# Altium PCB ECEN4620_JurassicSpark_SubModule.PcbDoc
Units mil, origin at the board's own origin, x right, y up, seen from the top; angles counter-clockwise.
Board outline 1660 x 2500 mil, 2 copper layers (Top Layer, Bottom Layer), stack 61.756 mil thick; 29 components, 13 nets, 87 pads, 17 vias.
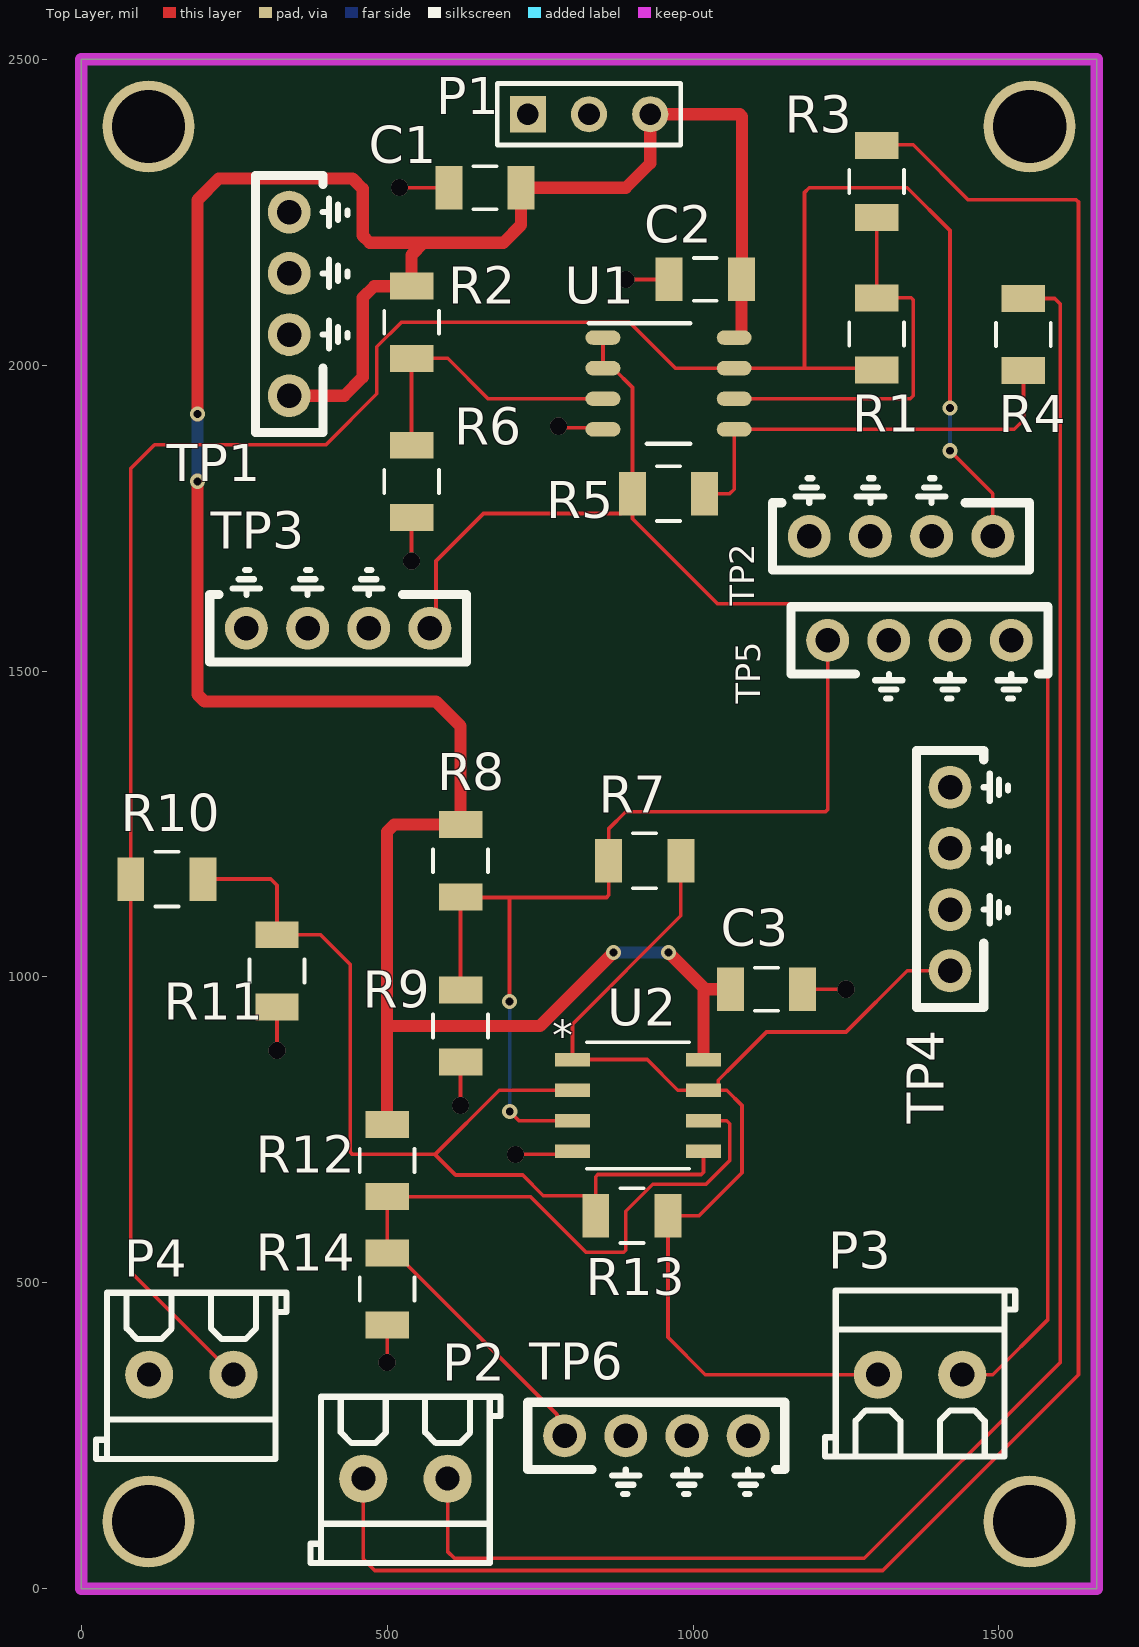
[diagram p0: Top Layer view]
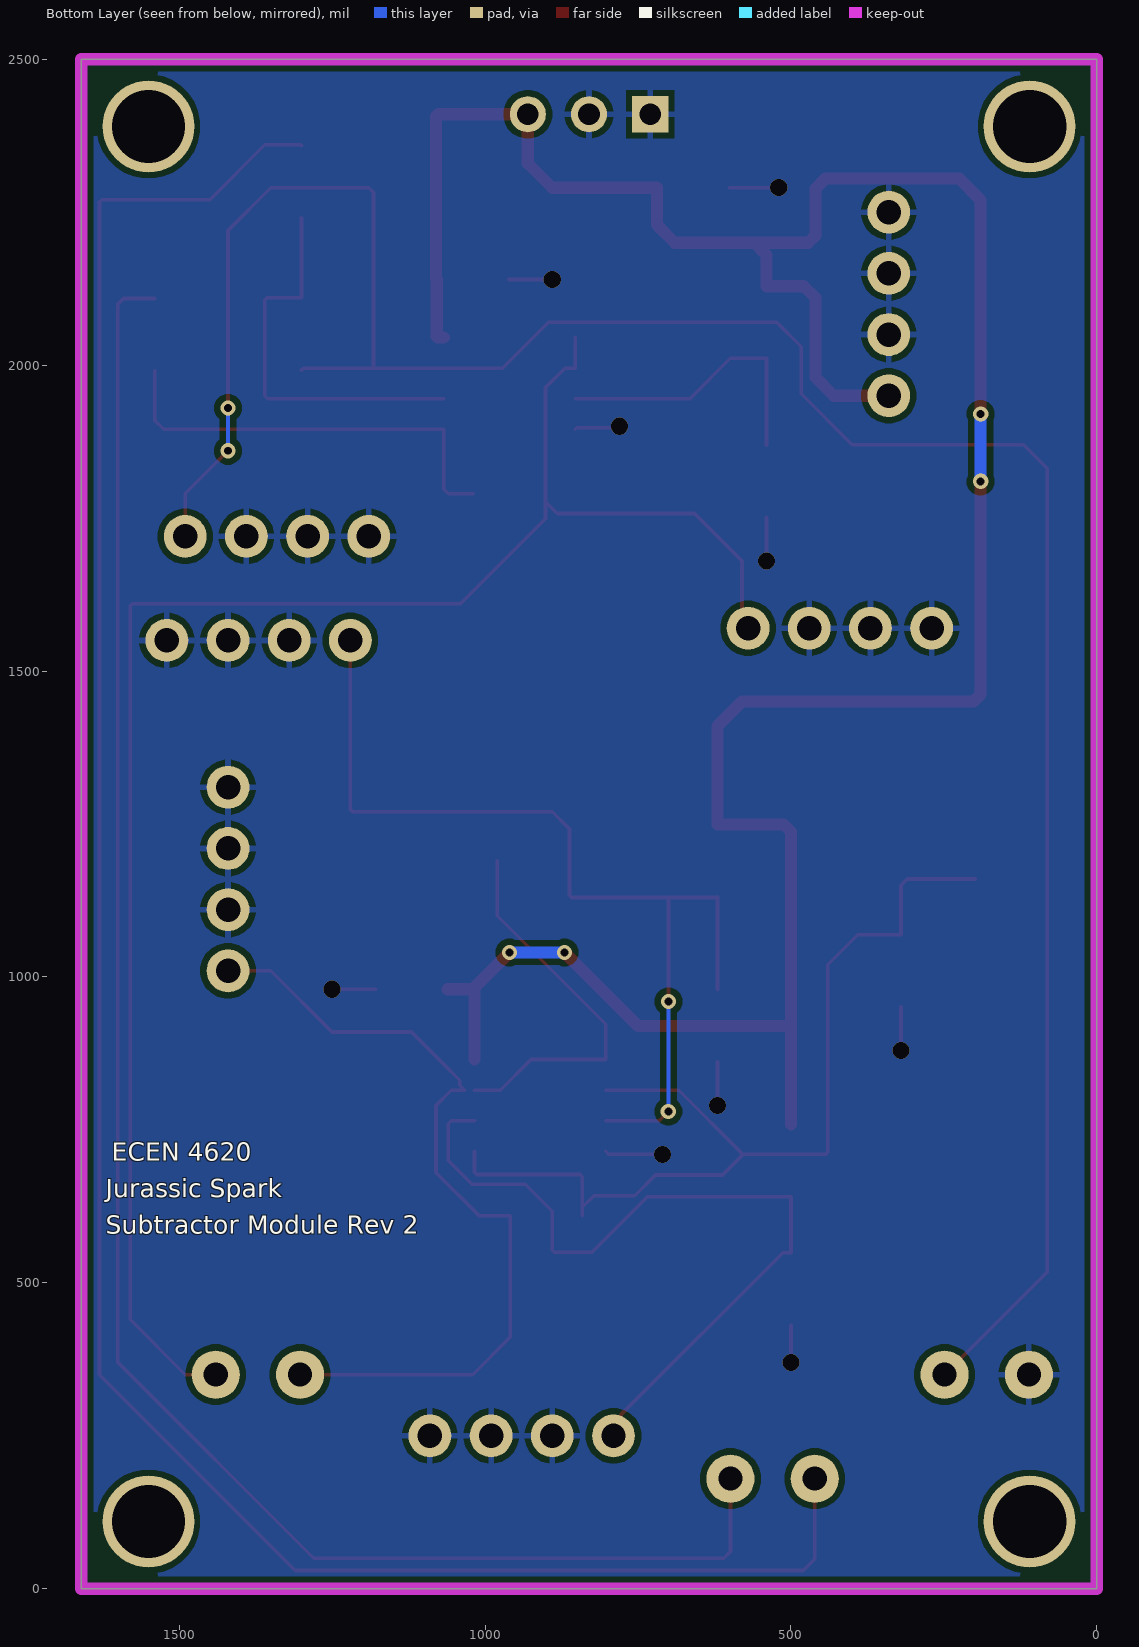
[diagram p1: Bottom Layer view, seen from below]
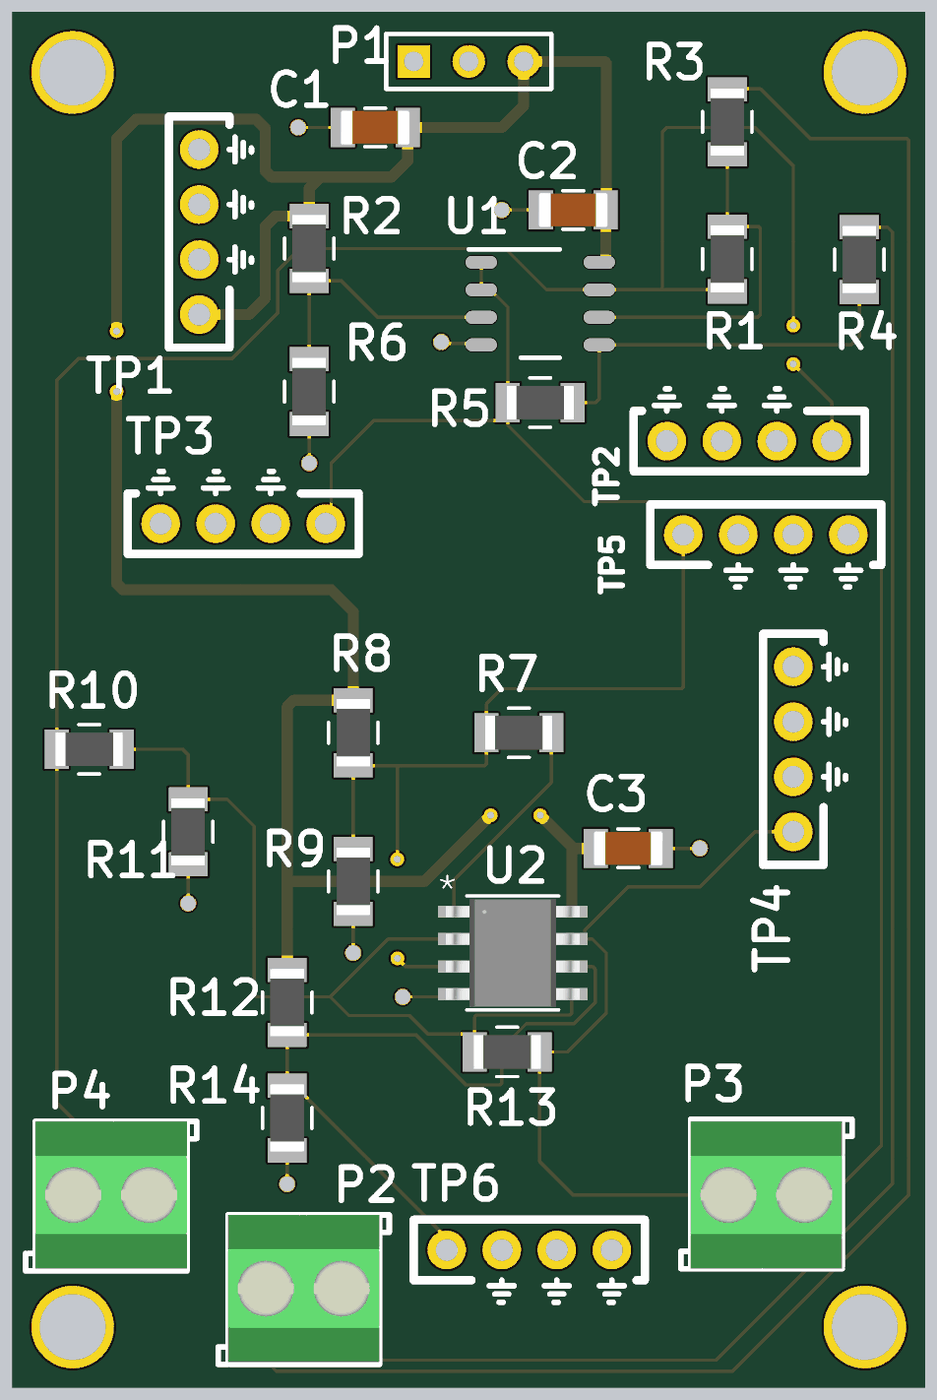
[diagram p2: 3D render of the assembled board from above, using the file's embedded part models]

## Layer stack, top to bottom
Top Solder: solder mask 1, SM-001, Dk 4
Top Layer: signal copper 1.378
Dielectric 1: core 59, Core-043, Dk 4.3
Bottom Layer: signal copper 1.378
Bottom Solder: solder mask 1, SM-001, Dk 4

## Board outline
0,0 1660,0 1660,2500 0,2500

## Design rules (kind name [scope] priority, off if disabled: settings)
BoardOutlineClearance [All] p1: gap=10 ignorepadtopadclearanceinfootprint=FALSE except(0: Arc-SplitContinuation Track-SplitContinuation SMDPad-SplitContinuation THPad-SplitContinuation Via-SplitContinuation Fill-SplitContinuation Poly-SplitContinuation Region-SplitContinuation Text-SplitContinuation)
Clearance [All] p1: gap=10 ignorepadtopadclearanceinfootprint=FALSE
PlaneClearance [All] p1: clearance=10
PlaneConnect [All] p1: planeconnectstyle=Direct reliefexpansion=20 reliefentries=4 reliefconductorwidth=10 reliefairgap=10
PolygonConnect [All] p1: thpad.connectstyle=Relief thpad.reliefconductorwidth=10 thpad.reliefentries=4 thpad.polygonreliefangle="90 Angle" thpad.airgapwidth=10 smdpad.connectstyle=Direct smdpad.reliefconductorwidth=10 smdpad.reliefentries=4 smdpad.polygonreliefangle="90 Angle" smdpad.airgapwidth=10 via.connectstyle=Direct via.reliefconductorwidth=10 via.reliefentries=4 via.polygonreliefangle="90 Angle" via.airgapwidth=10
RoutingVias [All] p1: holewidth=13 width=25 viastyle="Through Hole" minholewidth=13 minwidth=25 maxholewidth=60 maxwidth=80
SolderMaskExpansion [All] p1: expansion=4 istentingtop=FALSE
SupplyNets "Schematic Supply Nets_1" [InNet('+24')] p1: voltage=0.000
SupplyNets "Schematic Supply Nets" [InNet('GND')] p2: voltage=0.000
UnRoutedNet [All] p1: checkbadconnections=TRUE
Width [All] p1: maxlimit=100 minlimit=6 preferedwidth=6 minimp=50.000000 maximp=50.000000 favimp=50.000000
27 further rules are at their usual default settings.

## Components (designator, comment, footprint, x,y, rotation, side; value= is the part's Value field where it differs from the comment)
C1 "22uF" 1206_Passive_Capacitor 660,2290 r0 top
C2 "22uF" 1206_Passive_Capacitor 1020,2140 r0 top
C3 "22uF" 1206_Passive_Capacitor 1120,980 r180 top
P1 "Header 3" HDR1X3 730,2410 r0 top
P2 "2P Screw SubIn" "P_Terminal block 3.5mm-pitch" 530,180 r180 top
P3 "2P Screw SatOut" "P_Terminal block 3.5mm-pitch" 1371.1,350 r0 top
P4 "2P Screw SubOut" "P_Terminal block 3.5mm-pitch" 180,350 r180 top
R1 "10k" 1206_Passive_Resitor 1300,2051 r90 top value=10KOhm
R2 "10k" 1206_Passive_Resitor 540,2070 r90 top value=10KOhm
R3 "10k" 1206_Passive_Resitor 1300,2300 r90 top value=10KOhm
R4 "10k" 1206_Passive_Resitor 1540,2050 r90 top value=10KOhm
R5 "10k" 1206_Passive_Resitor 960,1790 r180 top value=10KOhm
R6 "10k" 1206_Passive_Resitor 540,1810 r90 top value=10KOhm
R7 "1k" 1206_Passive_Resitor 921,1190 r180 top value="330/330K Ohm"
R8 "1k" 1206_Passive_Resitor 620,1190 r90 top value="52K Ohm"
R9 "1k" 1206_Passive_Resitor 620,920 r90 top value="50K Ohm"
R10 "1k" 1206_Passive_Resitor 140,1160 r0 top value="1K Ohm"
R11 "1k" 1206_Passive_Resitor 320,1010 r90 top value="1K Ohm"
R12 "1M" 1206_Passive_Resitor 500,700 r90 top value="1M Ohm"
R13 "1k" 1206_Passive_Resitor 900,610 r180 top value="330/330K Ohm"
R14 "10k" 1206_Passive_Resitor 500,490 r90 top value=10KOhm
TP1 "TP_24V" TP10x_Probe 340,2100 r90 top
TP2 "TP_Sub_out" TP10x_Probe 1340,1720 r180 top
TP3 "TP_12V_ref" TP10x_Probe 420,1570 r180 top
TP4 "TP_Sat_out" TP10x_Probe 1420,1160 r90 top
TP5 "TP_52k/50k" TP10x_Probe 1370,1550 r0 top
TP6 "TP_1M/10k" TP10x_Probe 940,250 r0 top
U1 "OPA2196IDR" D0008A_N 960,1970 r0 top
U2 "LM393DR" D8 910,790 r0 top

## Footprints (in the part's own frame and the unit in brackets; to place one, negate y for a bottom-side part, rotate by r counter-clockwise, add the part's x,y. Pads: shape width x height; smd on the part's side, far side on the other; paste and mask are expansions set on the pad)
1206_Passive_Capacitor [mil]
  rect 44x71 smd: 1(-59,0) 2(59,0)
  silkscreen extent -19,-35 19,35, body extent -63,-31 63,32, height 50
1206_Passive_Resitor [mil]
  rect 44x71 smd: 1(-59,0) 2(59,0)
  silkscreen extent -19,-45 19,45, body extent -61,-31 61,31, height 26
D8 [mil]
  rect 57.28x21.97 smd paste+0 mask+0: 1(-107.14,75) 2(-107.14,25) 3(-107.14,-25) 4(-107.14,-75) 5(107.14,-75) 6(107.14,-25) 7(107.14,25) 8(107.14,75)
  silkscreen extent -84,-104 84,104, body extent -122,-99 122,99, height 69
D0008A_N [mm]
  oval 1.45x0.6 smd paste+0 mask+0.051: 1(-2.725,1.905) 2(-2.725,0.635) 3(-2.725,-0.635) 4(-2.725,-1.905) 5(2.725,-1.905) 6(2.725,-0.635) 7(2.725,0.635) 8(2.725,1.905)
  silkscreen extent -3.3,-2.5 0.9,2.5
HDR1X3 [mm] "Connector; Header; 3 Position"
  rect 1.5x1.5 hole 0.9: 1(0,0)
  round 1.5 hole 0.9: 2(2.54,0) 3(5.08,0)
  silkscreen extent -1.27,-1.27 6.35,1.27
"P_Terminal block 3.5mm-pitch" [mm]
  round 2 hole 1: 1(-1.75,0) 2(1.75,0)
  silkscreen extent -3.95,-3.4 3.95,3.5, body extent -3.5,-3.4 3.5,3.4, height 8.4
TP10x_Probe [mil] "Small Probs footprint"
  round 70 hole 40: 1(-150,0) 2(-50,0) 2(50,0) 2(150,0)
  silkscreen extent -210,-95 210,55

## Part data
C1 C2 C3: library part C_22uF_1206, "22uF ±10% 25V X5R 1206 Multilayer Ceramic Capacitors MLCC - SMD/SMT RoHS", LCSC Part#=C12891, MFR Part #=CL31A226KAHNNNE, Datasheet=https://datasheet.lcsc.com/lcsc/1811031514_Samsung-Electro-Mechanics-CL31A226KAHNNNE_C12891.pdf, Type=basic
P1: "Header, 3-Pin", LatestRevisionDate=17-Jul-2002, LatestRevisionNote="Re-released for DXP Platform.", Publisher="Altium Limited"
P2 P3 P4: library part "P_Terminal block", "Green Straight pin 3.5mm  pitch; P=3.5mm  Screw terminal ROHS", LCSC Part#=C474892, Manufacturer="Cixi Kefa Elec", MFR Part #=KF350-3.5-2P, Datasheet=https://datasheet.lcsc.com/lcsc/2001160007_Cixi-Kefa-Elec-KF350-3-5-2P_C474892.pdf
R1 R2 R3 R4 R5 R6 R14: library part R_10KOhm_1206, "10 kOhms ±5% 0.25W, 1/4W Chip Resistor 1206 (3216 Metric) Automotive AEC-Q200 Thick Film", LCSC Part#=C17902, MFR Part #=RMCF1206FT10K0, Digikey Link=https://www.digikey.com/en/products/detail/stackpole-electronics-inc/RMCF1206FT10K0/1759669, Type=Basic
R7 R8 R9 R10 R11 R13: library part R_1K_1206, "CHIP RESISTOR - SURFACE MOUNT 1KOHMS ±1% 1/4W 1206 ROHS", LCSC Part#=C4410, MFR Part #=RNCP1206FTD1K00CT, Digikey Link=https://www.digikey.com/product-detail/en/RNCP1206FTD1K00/RNCP1206FTD1K00CT-ND/2240675/?itemSeq=304982373, Type=Basic
R12: library part R_1M_1206, "CHIP RESISTOR - SURFACE MOUNT 1MOHMS ±1% 1/4W 1206 ROHS", LCSC Part#=C17927, MFR Part #=RMCF1206JT1M00, Digikey Link=https://www.digikey.com/product-detail/en/RMCF1206JT1M00/RMCF1206JT1M00CT-ND/1942830/?itemSeq=304982358, Type=Basic
TP1 TP2 TP3 TP4 TP5 TP6: library part TP_10x_Probe, "Test Point 300 mil centers"
U1: "Dual, 36-V, low power, all-purpose amplifier with mux-friendly input 8-SOIC -40 to 125", Manufacturer_Name="Texas Instruments", Copyright="Copyright (C) 2026 Ultra Librarian. All rights reserved.", Datasheet=https://www.ti.com/lit/gpn/opa2196, Manufacturer_Part_Number=OPA2196IDR, RefDes=RefDes, Type=TYPE
U2: "Dual differential comparator, commercial grade 8-SOIC 0 to 70", Manufacturer_Name="Texas Instruments", Copyright="Copyright (C) 2025 Ultra Librarian. All rights reserved.", Manufacturer_Part_Number=LM393DR, RefDes=RefDes, Type=Type

## Free pads (board coordinates)
  round 150 hole 120: 2(110,2390) 2(1550,2390) 3(110,110) 4(1550,110)

## Via types
v1: diameter 28, hole 28, Top Layer to Bottom Layer, 9 vias
v2: diameter 25, hole 13, Top Layer to Bottom Layer, 8 vias

## Nets (pads, with @x,y where several pads share a name; then routed paths per layer and width w, separated by ;. In a path a pad name is that pad's centre, name@x,y a point inside that pad or via, vN(x,y) a via of type N, cw(c..) or ccw(c..) an arc to the next point about the centre after c; other vN are vias at no path point)
12V_ref: P3.2 R5.2 TP3.1 U1.1 U1.2 | length 2882.7
  Top Layer w6: TP3.1 580,1580 580,1680 657.5,1757.5 882,1757.5 R5.2@901,1776.5 ; U1.1 U1.2 869.45,1995 901,1963.45 R5.2 R5.2@901,1776.5 ; P3.2 1490,350 1580,440 1580,1606.49 1576.49,1610 1040,1610 901,1749 R5.2@901,1776.5
+24: C1.2 C2.2 C3.2 P1.3 R2.2 R8.2 R12.2 TP1.1 U1.8 U2.8 | length 4741.9
  Top Layer w20: v2(190,1810) 190,1461.72 201.72,1450 580,1450 620,1410 R8.2 511.72,1249 500,1237.28 500,920 ; v2(190,1920) 190,2270 225,2305 443.28,2305 460,2288.28 460,2211.72 471.72,2200 560,2200 ; TP1.1 430,1950 460,1980 460,2110 479,2129 R2.2 540,2180 560,2200 ; R12.2 500,920 ; v2(870,1040) 750,920 500,920 ; v2(960,1040) 1017.14,982.86 ; U2.8 1017.14,982.86 ; C3.2 1020,980 1017.14,982.86 ; U1.8 1077.33,2045 1079,2046.67 C2.2 ; C2.2@1080,2141 1080,2406.49 1076.49,2410 P1.3 930,2330 890,2290 C1.2 719,2229 690,2200 560,2200
  Bottom Layer w20: v2(190,1810) v2(190,1920) ; v2(870,1040) v2(960,1040)
GND: C1.1 C2.1 C3.1 P1.1 P1.2 P4.2 R6.1 R9.1 R11.1 R14.1 TP1.2 TP2.2 TP3.2 TP4.2 TP5.2 TP6.2 U1.4 U2.4 | length 666.7
  Top Layer w6: v1(320,880) R11.1 ; v1(500,370) R14.1 ; v1(520,2290) C1.1 ; v1(540,1680) R6.1 ; v1(620,790) R9.1 ; v1(710,710) 797.86,710 U2.4 ; v1(780,1900) 782.5,1897.5 850.22,1897.5 U1.4 ; v1(890,2140) C2.1 ; C3.1 v1(1250,980)
NetR1_2: R1.2 R3.1 U1.6 | length 643.7
  Top Layer w6: U1.6 1355,1945 1360,1950 1360,2106.49 1356.49,2110 R1.2 R3.1
NetR2_1: R2.1 R6.2 U1.3 | length 482.1
  Top Layer w6: R6.2 R2.1 599,2011 665,1945 U1.3
NetR4_1: R4.1 R5.1 U1.5 | length 708.9
  Top Layer w6: R5.1 1060,1790 1067.28,1797.28 U1.5 1525,1895 1540,1910 R4.1
NetR7_2: R7.2 R8.1 R9.2 TP5.1 U2.3 | length 1610.7
  Top Layer w6: R9.2 R8.1 621,1130 700,1130 ; v2(700,960) 700,1130 ; v2(700.41,780) 715.41,765 U2.3 ; TP5.1 1220,1273.51 1216.49,1270 890,1270 862,1242 R7.2 862,1133.51 858.49,1130 700,1130
  Bottom Layer w6: v2(700,960) 700.2,959.8 700.2,780.2 v2(700.41,780)
NetR10_2: R10.2 R11.2 R13.2 U2.2 U2.5 | length 1636.4
  Top Layer w6: R10.2 310,1160 320,1150 R11.2 391,1069 440,1020 440,713.51 443.51,710 578.18,710 ; U2.2 683.18,815 578.18,710 ; R13.2 R13.2@841,623.5 ; U2.5 1017.14,680.65 1013.62,677.14 844.51,677.14 841,673.62 R13.2@841,623.5 ; 578.18,710 611.93,676.25 721.49,676.25 755.24,642.5 822,642.5 R13.2@841,623.5
NetR12_1: R12.1 R14.2 TP6.1 U2.6 | length 1321
  Top Layer w6: TP6.1 777.75,262.25 777.75,284.75 513.5,549 R14.2 R12.1 734.12,641 825.12,550 886.49,550 890,553.51 890,616.88 934.26,661.14 1021.29,661.14 1060,699.85 1060,760 1055,765 U2.6
Sat_out: P3.1 R7.1 R13.1 TP4.1 U2.1 U2.7 | length 1990.4
  Top Layer w6: R7.1 980,1100 802.86,922.86 U2.1 925,865 975,815 U2.7 ; P3.1 1020,350 959,411 R13.1 1010,610 1080,680 1080,790 1055,815 1033.26,815 1041.25,822.98 1041.25,831.25 1051.02,841.02 1051.16,841.02 1058.78,848.63 1058.78,848.78 1120,910 1250,910 1350,1010 TP4.1
Sub_out: P4.1 R1.1 R10.1 TP2.1 U1.7 | length 4032
  Top Layer w6: P4.1 81,517.9 R10.1 81,1831 120,1870 400,1870 483,1953 483,2029.88 522.93,2069.81 896.65,2069.81 971.46,1995 U1.7 1182.14,1995 ; R1.1 1297,1995 1182.14,1995 ; v2(1420,1860) 1490,1790 TP2.1 ; v2(1420,1930) 1420,2220 1350,2290 1190,2290 1182.14,2282.14 1182.14,1995
  Bottom Layer w6: v2(1420,1860) v2(1420,1930)
V_Sub_in_1: P2.2 R3.2 | length 3726
  Top Layer w6: P2.2 461.1,48.9 480,30 1310,30 1630,350 1630,2266.49 1626.49,2270 1450,2270 1360,2360 1301,2360 R3.2
V_Sub_in_2: P2.1 R4.2 | length 3050.9
  Top Layer w6: P2.1 598.9,61.1 610,50 1280,50 1600,370 1600,2100 1591,2109 R4.2

## Polygon pours and split planes (outlines as drawn)
GND on Bottom Layer "GND_L02_P001" (solid, pour order 1): 0,2500 1650,2500 1650,0 25,0 0,25

## Keep-outs
Keep-Out Layer:
  the board outline again, w20

## Silkscreen, mask and mechanical layers (free items; w line width, h text height)
Bottom Overlay:
  text "ECEN 4620" at 1610,700 h30
  text "Jurassic Spark" at 1620,640 h30
  text "Subtractor Module Rev 2" at 1620,580 h30

## Text inside footprints (layer, text, board x,y; h text height)
U2: Top Overlay "*" at 770,880 h50; Mechanical 13 "*" at 834,835.5 h50